# Altium PCB PCB_Power_Jack_V2.00.PcbDoc
Units mm, origin at the board's own origin, x right, y up, seen from the top; angles counter-clockwise.
Board outline 47.88 x 74.3 mm, 2 copper layers (Top Layer, Bottom Layer), stack 1.571 mm thick; 24 components, 6 nets, 81 pads, 103 vias.
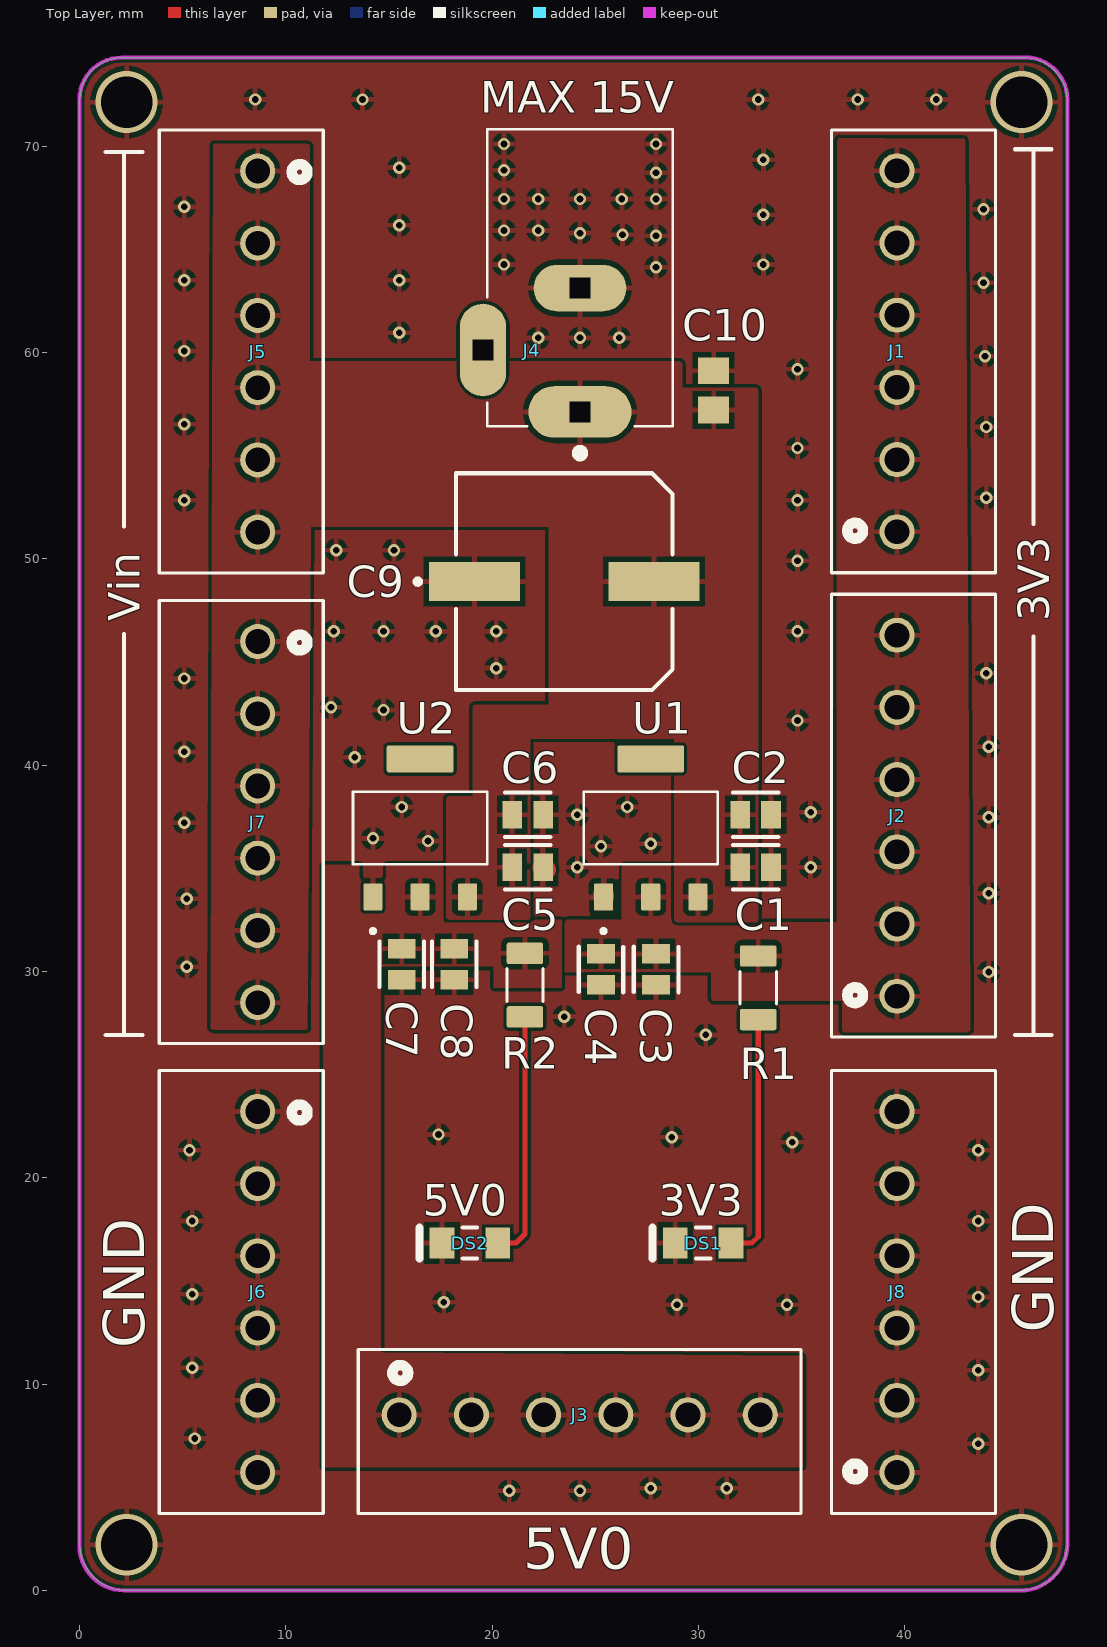
[diagram p0: Top Layer view]
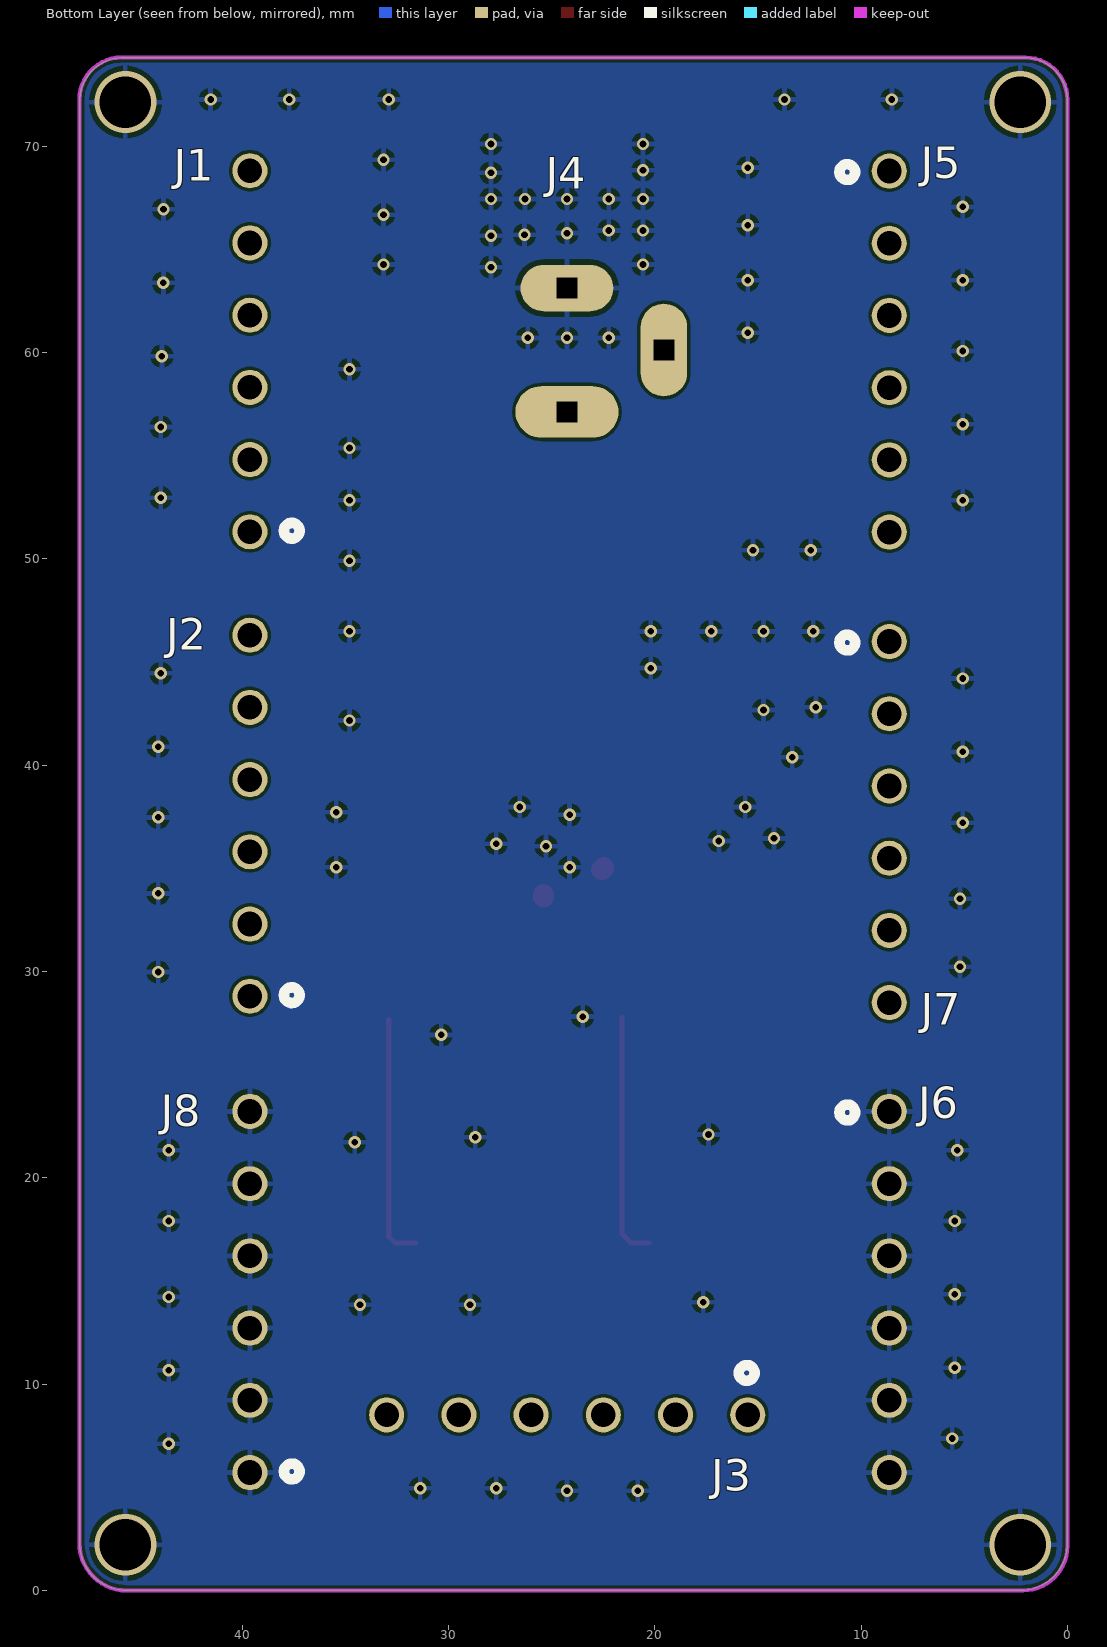
[diagram p1: Bottom Layer view, seen from below]
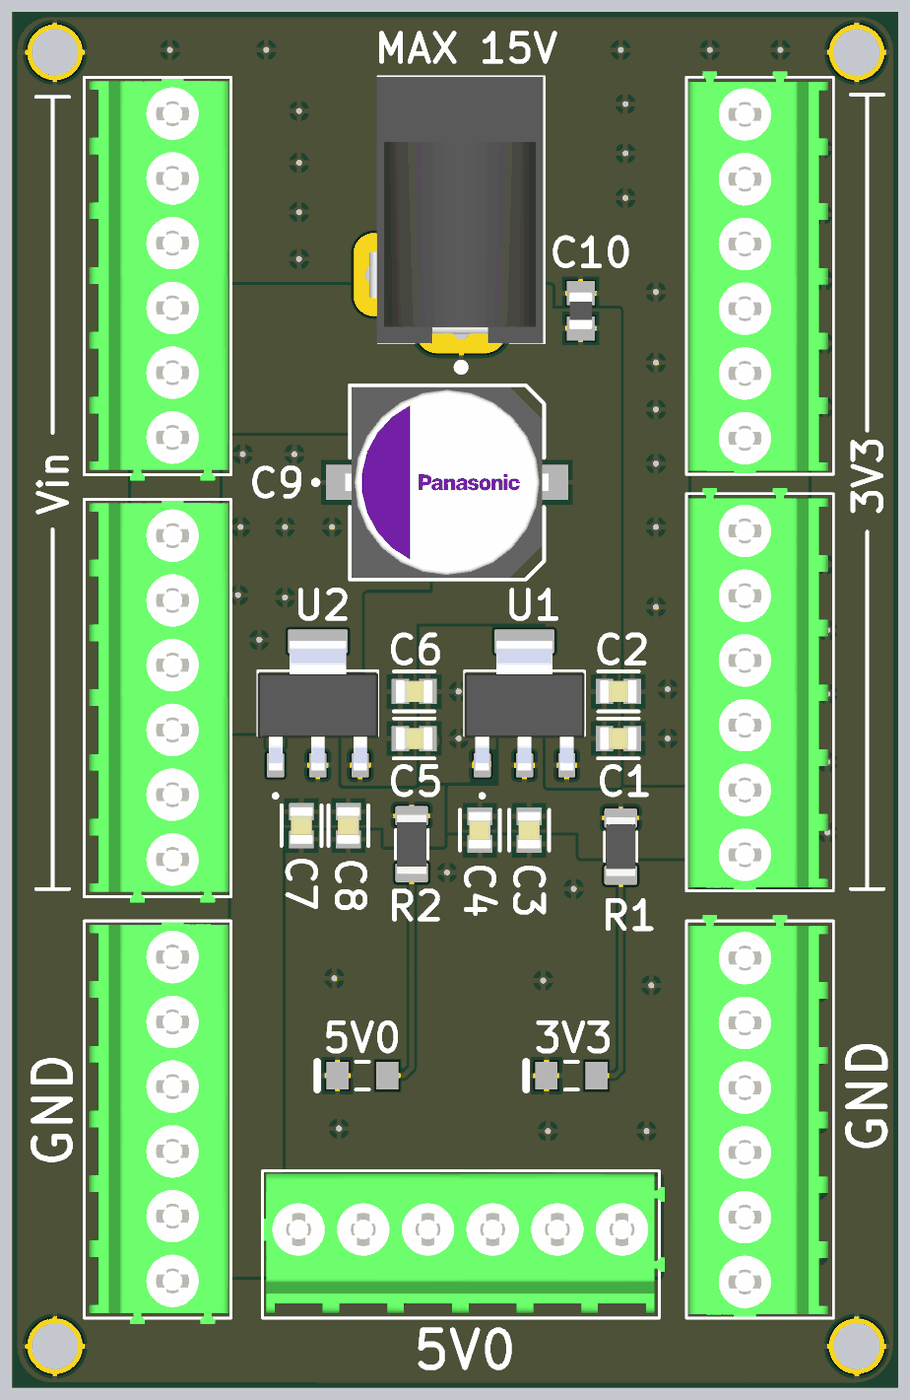
[diagram p2: 3D render of the assembled board from above, using the file's embedded part models]

## Layer stack, top to bottom
Top Solder: solder mask 0.0102, Solder Resist, Dk 3.5
Top Layer: signal copper 0.0356
Dielectric 1: dielectric 1.5, FR-4, Dk 4.8
Bottom Layer: signal copper 0.0356
Bottom Solder: solder mask 0.0102, Solder Resist, Dk 3.5

## Board outline
0,2.286 0,72.2 -0.001,72.2 cw(c2.096,72.2) 2.096,74.296 2.032,74.295 45.847,74.295 45.752,74.297 cw(c45.752,72.168) 47.881,72.168 47.879,72.168 47.879,2.286 cw(c45.593,2.286) 45.593,0 2.286,0 cw(c2.286,2.286)

## Design rules (kind name [scope] priority, off if disabled: settings)
Clearance [All] p1: gap=0.15 ignorepadtopadclearanceinfootprint=FALSE
HoleSize HoleSize_Jack [InComponent('J4')] p1: absolutevalues=TRUE maxlimit=6 minlimit=0.025 maxpercent=80.000 minpercent=20.000
HoleSize [All] p2: absolutevalues=TRUE maxlimit=2.54 minlimit=0.3 maxpercent=80.000 minpercent=20.000
PolygonConnect [All] p1: connectstyle=Relief reliefconductorwidth=0.254 reliefentries=4 polygonreliefangle="90 Angle" airgapwidth=0.254
RoutingVias [All] p1: holewidth=0.711 width=1.27 viastyle="Through Hole" minholewidth=0.711 minwidth=1.27 maxholewidth=0.711 maxwidth=1.27
SilkToSilkClearance [All] p1: silktosilkclearance=0.15
SilkToSolderMaskClearance [IsPad] p1: minsilkscreentomaskgap=0.15 clearancetoexposedcopper=TRUE
SolderMaskExpansion SolderMaskExpansion_Tented_GND [HoleSize = 0.321] p1: expansion=0.102 istentingtop=TRUE
SolderMaskExpansion SolderMaskExpansion_1 [All] p2: expansion=0.102 istentingtop=FALSE
SupplyNets "Schematic Supply Nets_3" [InNet('GND')] p1: voltage=0.000
SupplyNets "Schematic Supply Nets_2" [InNet('+5V0')] p2: voltage=0.000
SupplyNets "Schematic Supply Nets_1" [InNet('+3V3')] p3: voltage=0.000
SupplyNets "Schematic Supply Nets" [InNet('+Vin')] p4: voltage=0.000
Width Width_PWR [InNet('+3V3') OR InNet('+5V0') OR InNet('+Vin') OR InNet('GND')] p1: maxlimit=1 minlimit=1 preferedwidth=1 minimp=50.000000 maximp=50.000000 favimp=50.000000
Width Width_1 [All] p2: maxlimit=0.254 minlimit=0.254 preferedwidth=0.254
27 further rules are at their usual default settings.

## Classes and differential pairs
net class Vin: +Vin
net class 5V0: +5V0
net class GND: GND

## Components (designator, comment, footprint, x,y, rotation, side; value= is the part's Value field where it differs from the comment)
C1 "10uF" FP-C0805C-DG-MFG 32.766,35.052 r180 top
C2 "100nF" FP-C0805C-DG-MFG 32.766,37.592 r180 top value=10uF
C3 "22uF" FP-C0805C-DG-MFG 27.94,30.099 r90 top value=10uF
C4 "100nF" FP-C0805C-DG-MFG 25.273,30.099 r90 top value=10uF
C5 "10uF" FP-C0805C-DG-MFG 21.717,35.052 r180 top
C6 "100nF" FP-C0805C-DG-MFG 21.717,37.592 r180 top value=10uF
C7 "22uF" FP-C0805C-DG-MFG 15.621,30.353 r90 top value=10uF
C8 "100nF" FP-C0805C-DG-MFG 18.161,30.353 r90 top value=10uF
C9 "1000uF" FP-OS-CON-SMT-F10-MFG 23.495,48.895 r0 top locked
C10 "100nF" CAP0805 30.734,58.166 r90 top value=805
DS1 "Red LED" LUMX-SML-LX1206IC_V 30.226,16.834 r180 top
DS2 "Red LED" LUMX-SML-LX1206IC_V 18.923,16.834 r180 top
J1 "1984659" CONN_1984659_PXC 39.624,51.308 r90 top value="6 Pos 3.5mm"
J2 "1984659" CONN_1984659_PXC 39.624,28.799 r90 top value="6 Pos 3.5mm"
J3 "1984659" CONN_1984659_PXC 15.494,8.509 r0 top value="6 Pos 3.5mm"
J4 "PJ-002A" CUI_PJ-002A 24.257,57.119 r90 top locked value="2.5A @ 24 VDC"
J5 "1984659" CONN_1984659_PXC 8.636,68.793 r270 top value="6 Pos 3.5mm"
J6 "1984659" CONN_1984659_PXC 8.636,23.215 r270 top value="6 Pos 3.5mm"
J7 "1984659" CONN_1984659_PXC 8.636,45.989 r270 top value="6 Pos 3.5mm"
J8 "1984659" CONN_1984659_PXC 39.624,5.715 r90 top value="6 Pos 3.5mm"
R1 "330R" RES1206 32.893,29.21 r270 top value=1206
R2 "330R" RES1206 21.59,29.337 r270 top value=1206
U1 "AMS1117-3.3" SOT229P700X180-4N 27.686,36.957 r90 top locked value="0.8A, 15V"
U2 "AMS1117-5.0" SOT229P700X180-4N 16.51,36.957 r90 top locked value="0.8A, 15V"

## Footprints (in the part's own frame and the unit in brackets; to place one, negate y for a bottom-side part, rotate by r counter-clockwise, add the part's x,y. Pads: shape width x height; smd on the part's side, far side on the other; paste and mask are expansions set on the pad)
CAP0805 [mm]
  rect 1.3x1.5 smd: 1(-0.95,0) 2(0.95,0)
  body extent -1,-0.63 1,0.63, height 0.7
CONN_1984659_PXC [mil]
  round 67 / inner round 60 / far side round 67 hole 47 paste-99999 mask+0: 1(0,0) 2(137.8,0) 3(275.59,0) 4(413.39,0) 5(551.18,0) 6(688.98,0)
  silkscreen extent -78,-188 767,125, body extent -75,-177 779,121, height 360
CUI_PJ-002A [mm]
  oval 2.5x5 hole 1 square: 1(0,0)
  oval 2.25x4.5 hole 1 square: 2(6,0)
  oval 4.5x2.25 hole 1 square: 3(3,4.7)
  silkscreen extent -2.2,-4.5 13.7,4.5, body extent -0.72,-4.44 13.68,4.96, height 11.2
FP-C0805C-DG-MFG [mm]
  rect 0.95x1.35 smd paste+0 mask+0: 1(-0.75,0) 2(0.75,0)
  silkscreen extent -1.11,-1.08 1.1,1.07, body extent -1.4,-0.85 1.4,0.85, height 0.25
FP-OS-CON-SMT-F10-MFG [mm]
  rect 4.4x1.9 smd paste+0 mask+0: 1(-4.35,0) 2(4.35,0)
  silkscreen extent -7.22,-5.25 5.25,5.25, body extent -6.8,-5.5 6.8,5.5, height 0.25
LUMX-SML-LX1206IC_V [mm] "SMD, 2-Leads, Body 3.2x1.5mm"
  rect 1.2x1.5 smd: 1(-1.35,0) 2(1.35,0)
  silkscreen extent -0.35,-0.75 2.45,0.75, body extent -1.6,-0.8 1.6,0.8, height 1.1
RES1206 [mm] "Resistor, Chip; 3.20 mm L X 1.60 mm W X 0.65 mm H body (Case Code: 3216 mm / 1206 mil; Package: SAMSUNGEM RC3216; Tool: Library Expert Pro 19)"
  rrect19% 1.04x1.77 smd: 1(-1.54,0) 2(1.54,0)
  silkscreen extent -0.79,-0.88 0.79,0.88, body extent -1.6,-0.8 1.6,0.8, height 0.65
SOT229P700X180-4N [mm]
  rrect15% 1.31x0.93 smd: 1(-3.345,2.29) 2(-3.345,0) 3(-3.345,-2.29)
  rrect15% 1.31x3.24 smd: 4(3.345,0)
  silkscreen extent -5.1,-3.25 1.75,3.25, body extent -3.63,-3.25 3.37,3.25, height 1.8

## Part data
C1 C5: library part CMP-2007-03243-2, "CAP CER 10UF 10V X5R 0805", 3DS Part Number=220-00001, Manufacturer=Kemet, Manufacturer Part Number=C0805C106K8PACTU, Package=C0805C-DG, Temperature="-55°C to +85°C", Temperature Characteristic=X5R, Temperature Coefficient=15%, Temperature Range High=+85°C, Temperature Range Low=-55°C, Tolerance=10%, Voltage=10V, Automotive=No, Capacitance=10uF, Category=Cap, ComponentLink2Description=Datasheet, ComponentLink2URL=https://content.kemet.com/datasheets/KEM_C1006_X5R_SMD.pdf, Device Class L1="Passive Components", Device Class L2=Capacitors, Device Class L3="Ceramic Capacitors", Digikey Description="CAP CER 10UF 10V X5R 0805", Height=1.4mm, Ipc Land Pattern Name=CAPC200125X125, Lead Free=Yes, Material=Ceramic, Mouser Description="CAP CER 10UF 10V X5R 0805", Octopart=https://octopart.com/c0805c106k8pactu-kemet-98697, RoHS=TRUE, Voltage Rating=10V
C2 C3 C4 C6 C7 C8: library part CMP-2007-03243-2, "CAP CER 10UF 10V X5R 0805", 3DS Part Number=220-00001, Capacitance=10uF, Manufacturer=Kemet, Manufacturer Part Number=C0805C106K8PACTU, Package=C0805C-DG, Temperature="-55°C to +85°C", Temperature Characteristic=X5R, Temperature Coefficient=15%, Temperature Range High=+85°C, Temperature Range Low=-55°C, Tolerance=10%, Voltage=10V, Automotive=No, Category=Cap, ComponentLink2Description=Datasheet, ComponentLink2URL=https://content.kemet.com/datasheets/KEM_C1006_X5R_SMD.pdf, Device Class L1="Passive Components", Device Class L2=Capacitors, Device Class L3="Ceramic Capacitors", Digikey Description="CAP CER 10UF 10V X5R 0805", Height=1.4mm, Ipc Land Pattern Name=CAPC200125X125, Lead Free=Yes, Material=Ceramic, Mouser Description="CAP CER 10UF 10V X5R 0805", Octopart=https://octopart.com/c0805c106k8pactu-kemet-98697, RoHS=TRUE, Voltage Rating=10V
C9: library part CMP-05428-000276-1, "CAP ALUM POLY 1000UF 20% 16V SMD", RoHS Compliant=Yes
C10: library part "Capacitor 0805", "Capacitor 0805", Package="0805 Yageo", TempMax=125, TempMin=-55, Check_prices=https://www.snapeda.com/parts/CC0805KRX7R9BB104/Yageo/view-part/?ref=eda, Link=-, MF=Yageo, MP=CC0805KRX7R9BB104, Part Number="Capacitor 0805", PartID="Capacitor 0805", SnapEDA_Link=https://www.snapeda.com/parts/CC0805KRX7R9BB104/Yageo/view-part/?ref=snap
DS1 DS2: library part CMP-2000-07123-1, "LED Red, 65 mW, -40 to 85 degC, 2-Pin SMD, RoHS, Tape and Reel", Color=Red, Manufacturer=Lumex, Operating Temperature=-25to85C, Package Description="2-Pin Surface Mount Device, Body 3.2 x 1.5 mm", Package Reference=SML-LX1206IC, Part No=SML-LX1206IC-TR, Reverse Voltage=5(Min)V, Supplier_Package=SMD, Datasheet URL=http://www.lumex.com/content/files/ProductAttachment/SML-LX1206IC-TR.pdf, Datasheet Version="Rev. J, 08/2012", Dimension=3.2x1.6x1.1mm, Dominant Wavelength=N/A, ECCN=EAR99, Family=SML-LX1206IC, HTS=8541402000, Intensity=6mcd, LED Material=GaAsP, Lens Appearance=ColorlessNonDiffused, Lens Dimensions=2x1.6x0.5mm, Manufacturer URL=http://www.lumexinstruments.com/, Mounting=SurfaceMount, Mounting Technology=SurfaceMount, Number of LEDs=1, Packaging=TapeandReel, Peak Wavelength=635nm, Pin_Count=2, RoHS=Unknown, Supplier=Lumex, Supplier Standard Pack=3,000, Type=Uni-Color, Viewing Angle=160
J1 J2 J3 J5 J6 J7 J8: "6 Position Wire to Board Terminal Block Horizontal with Board 0.138\" (3.50mm) Through Hole", Manufacturer_Name="Phoenix Contact", TempMax=125, TempMin=-40, Copyright="Copyright (C) 2025 Ultra Librarian. All rights reserved.", Link=https://www.digikey.de/en/products/detail/phoenix-contact/1984659/950852, Manufacturer_Part_Number=1984659, Part Number=1984659, PartID=1984659, RefDes=RefDes, Type=Type
J4: "DC Power Connectors Power Jacks 2x5.5mm", Package=None, TempMax=85, TempMin=-25, Check_prices=https://www.snapeda.com/parts/PJ-002A/Same+Sky/view-part/?ref=eda, Link=https://www.sameskydevices.com/product/resource/pj-002a.pdf, MF="Same Sky", MP=PJ-002A, Part Number=PJ-002A, PartID=PJ-002A, SnapEDA_Link=https://www.snapeda.com/parts/PJ-002A/Same+Sky/view-part/?ref=snap
R1 R2: library part "Resistor 1206", "Resistor 1206", TempMax=125, TempMin=-55, Link=-, Part Number="Resistor 1206", PartID="Resistor 1206"
U1: "Linearer Spannungsregler, 800 mA, 15 V", Package="SOT-223 Seeed Technology", TempMax=125, TempMin=-40, Check_prices=https://www.snapeda.com/parts/AMS1117-3.3/Advanced+Monolithic+Systems/view-part/?ref=eda, Link=https://www.snapeda.com/parts/AMS1117-3.3/Advanced%20Monolithic%20Systems/datasheet/, MF="Advanced Monolithic Systems", MP=AMS1117-3.3, Part Number=AMS1117-3.3, PartID=AMS1117-3.3, SnapEDA_Link=https://www.snapeda.com/parts/AMS1117-3.3/Advanced+Monolithic+Systems/view-part/?ref=snap
U2: library part AMS1117-3.3, "Linearer Spannungsregler, 800 mA, 15 V", Package="SOT-223 Seeed Technology", TempMax=125, TempMin=-40, Check_prices=https://www.snapeda.com/parts/AMS1117-3.3/Advanced+Monolithic+Systems/view-part/?ref=eda, Link=https://www.snapeda.com/parts/AMS1117-3.3/Advanced%20Monolithic%20Systems/datasheet/, MF="Advanced Monolithic Systems", MP=AMS1117-3.3, Part Number=AMS1117-3.3, PartID=AMS1117-3.3, SnapEDA_Link=https://www.snapeda.com/parts/AMS1117-3.3/Advanced+Monolithic+Systems/view-part/?ref=snap

## Via types
v1: diameter 0.6, hole 0.321, Top Layer to Bottom Layer, tented both sides, 99 vias
v2: diameter 3, hole 2.5, Top Layer to Bottom Layer, 4 vias

## Nets (pads, with @x,y where several pads share a name; then routed paths per layer and width w, separated by ;. In a path a pad name is that pad's centre, name@x,y a point inside that pad or via, vN(x,y) a via of type N, cw(c..) or ccw(c..) an arc to the next point about the centre after c; other vN are vias at no path point)
+3V3: C3.2 C4.2 J1.1 J1.2 J1.3 J1.4 J1.5 J1.6 J2.1 J2.2 J2.3 J2.4 J2.5 J2.6 R1.1 U1.2
+5V0: C7.2 C8.2 J3.1 J3.2 J3.3 J3.4 J3.5 J3.6 R2.1 U2.2
+Vin: C1.2 C2.2 C5.2 C6.2 C9.2 C10.1 J4.1 J5.1 J5.2 J5.3 J5.4 J5.5 J5.6 J7.1 J7.2 J7.3 J7.4 J7.5 J7.6 U1.3 U2.3
GND: C1.1 C2.1 C3.1 C4.1 C5.1 C6.1 C7.1 C8.1 C9.1 C10.2 DS1.2 DS2.2 J4.2 J6.1 J6.2 J6.3 J6.4 J6.5 J6.6 J8.1 J8.2 J8.3 J8.4 J8.5 J8.6 U1.1 U2.1 | length 0.3
  Top Layer w1: C5.1 ccw(c22.594,35.052) C5.1@22.594,34.925 ; U1.1 U1.1@25.396,33.732
  other v1: 20.828,4.826 24.257,4.826 27.686,4.953 31.369,4.953 43.561,7.112 5.588,7.366 43.561,10.668 5.461,10.795 28.956,13.843 34.29,13.843 17.653,13.97 43.561,14.224 5.461,14.351 5.461,17.907 43.561,17.907 5.334,21.336 43.561,21.336 34.544,21.717 28.702,21.971 17.399,22.098 30.353,26.924 23.495,27.813 44.069,29.972 5.207,30.226 5.207,33.528 44.069,33.782 24.13,35.052 35.433,35.052 25.273,36.068 27.686,36.195 16.891,36.322 14.224,36.449 5.08,37.211 44.069,37.465 24.13,37.592 35.433,37.719 15.621,37.973 26.543,37.973 13.335,40.386 5.08,40.64 44.069,40.894 34.798,42.164 14.732,42.672 12.192,42.799 5.08,44.196 43.942,44.45 20.193,44.704 12.319,46.482 14.732,46.482 17.272,46.482 20.193,46.482 34.798,46.482 34.798,49.911 12.446,50.419 15.24,50.419 5.08,52.832 34.798,52.832 43.942,52.959 34.798,55.372 43.942,56.388 5.08,56.515 34.798,59.182 43.887,59.823 5.08,60.071 22.225,60.706 24.257,60.706 26.162,60.706 15.494,60.96 43.815,63.373 5.08,63.5 15.494,63.5 27.94,64.135 20.574,64.262 33.147,64.262 27.94,65.659 26.317,65.702 24.257,65.786 20.574,65.913 22.225,65.913 15.494,66.167 33.147,66.675 43.812,66.939 5.08,67.056 20.574,67.437 22.225,67.437 24.257,67.437 26.289,67.437 27.94,67.437 27.94,68.707 20.574,68.834 15.494,68.961 33.147,69.342 20.574,70.104 27.94,70.104 8.509,72.263 13.716,72.263 32.893,72.263 37.719,72.263 41.529,72.263
  other v2: 2.286,2.216 45.66,2.216 2.286,72.133 45.66,72.133
NetDS1_1: DS1.1 R1.2 | length 12
  Top Layer w0.254: DS1.1 32.582,16.834 32.893,17.145 R1.2
NetDS2_1: DS2.1 R2.2 | length 12
  Top Layer w0.254: DS2.1 21.152,16.834 21.59,17.272 R2.2
pads on no net: J4.3 U1.4 U2.4

## Polygon pours and split planes (outlines as drawn)
GND on Top Layer "NONET_L-01_P-001" (solid, pour order 9): 0.127,72.263 cw(c2.032,72.263) 2.032,74.168 45.847,74.168 cw(c45.847,72.263) 47.752,72.263 47.752,2.159 cw(c45.72,2.159) 45.72,0.127 2.159,0.127 cw(c2.159,2.159) 0.127,2.159
+Vin on Top Layer "+VIN_L01_P001" (solid, pour order 1): 28.829,32.385 32.893,32.385 32.893,58.293 29.21,58.293 29.21,59.563 20.828,59.563 11.169,59.563 11.169,70.104 6.477,70.104 6.35,27.178 11.049,27.178 11.207,51.562 22.733,51.562 22.733,42.926 19.05,42.926 19.05,38.481 17.78,38.481 17.78,32.512 21.844,32.512 21.844,41.275 28.829,41.275 28.829,37.973
+5V0 on Top Layer "+5V0_L01_P008" (solid, pour order 8): 17.78,35.179 17.78,32.512 23.368,32.512 23.368,29.21 20.066,29.21 20.066,30.226 14.605,30.226 14.605,20.066 14.605,11.534 35.052,11.365 35.052,5.97 11.811,5.97 11.811,35.179
+5V0 on Top Layer "+5V0_L01_P007" (solid, pour order 7): 17.776,35.179 17.776,32.512 23.364,32.512 23.364,29.21 20.062,29.21 20.062,30.226 14.601,30.226 14.601,20.066 14.601,11.534 35.048,11.365 35.048,5.97 11.807,5.97 11.807,35.179
+3V3 on Top Layer "+3V3_L01_P003" (solid, pour order 3): 28.829,35.179 28.829,32.385 36.703,32.385 36.719,70.401 42.926,70.358 43.18,27.051 36.957,27.051 36.957,28.575 30.607,28.575 30.607,29.972 23.368,29.972 23.368,32.512 26.289,32.512 26.289,35.179
+5V0 on Top Layer "+5V0_L01_P002" (solid, pour order 2): 17.78,35.179 17.78,32.512 23.368,32.512 23.368,29.21 20.066,29.21 20.066,30.226 14.605,30.226 14.605,20.066 14.605,11.534 35.052,11.365 35.052,5.97 11.811,5.97 11.811,35.179
GND on Bottom Layer "NONET_L-01_P-001" (solid, pour order 10): 0.127,72.263 cw(c2.032,72.263) 2.032,74.168 45.847,74.168 cw(c45.847,72.263) 47.752,72.263 47.752,2.286 cw(c45.593,2.286) 45.593,0.127 2.159,0.127 cw(c2.159,2.159) 0.127,2.159

## Keep-outs
Keep-Out Layer:
  lines w0.2: 45.847,74.299 cw(c45.847,72.263) 47.883,72.263 47.879,2.159 ; 45.974,74.295 2.032,74.295 ccw(c2.032,72.263) 0,72.263 0,2.159 ccw(c2.159,2.159) 2.159,0 45.593,-0.004 ccw(c45.593,2.286) 47.883,2.286

## Silkscreen, mask and mechanical layers (free items; w line width, h text height)
Top Overlay:
  lines w0.2: 1.27,26.924 3.048,26.924 ; 1.27,69.723 3.048,69.723 ; 2.159,26.924 2.159,46.355 ; 2.159,51.562 2.159,69.723 ; 45.339,26.924 47.117,26.924 ; 45.339,69.85 47.117,69.85 ; 46.228,26.924 46.228,46.228 ; 46.228,51.689 46.228,69.85
  text "MAX 15V" at 19.431,71.628 h1.52
  text "Vin" at 2.921,46.981 h1.52 r90
  text "3V3" at 46.99,46.981 h1.52 r90
  text "5V0" at 16.637,18.161 h1.52
  text "3V3" at 28.067,18.161 h1.52
  text "GND" at 47.198,12.492 h2 r90
  text "GND" at 3.129,11.73 h2 r90
  text "5V0" at 21.509,1.062 h2
Board Outer:
  lines w0.2: -0.001,72.2 cw(c2.096,72.2) 2.096,74.296 ; 0,72.2 0,2.286 ccw(c2.286,2.286) 2.286,0 45.593,0 ccw(c45.593,2.286) 47.879,2.286 47.879,72.168 ; 2.032,74.295 45.847,74.295 ; 45.752,74.297 cw(c45.752,72.168) 47.881,72.168